# Altium PCB FM110236A1.PcbDoc
Units mm, origin at the board's own origin, x right, y up, seen from the top; angles counter-clockwise.
Board outline 40 x 24 mm, 4 copper layers (Top Layer, Internal Plane 1, Internal Plane 2, Bottom Layer); 14 components, 21 nets, 61 pads, 14 vias.
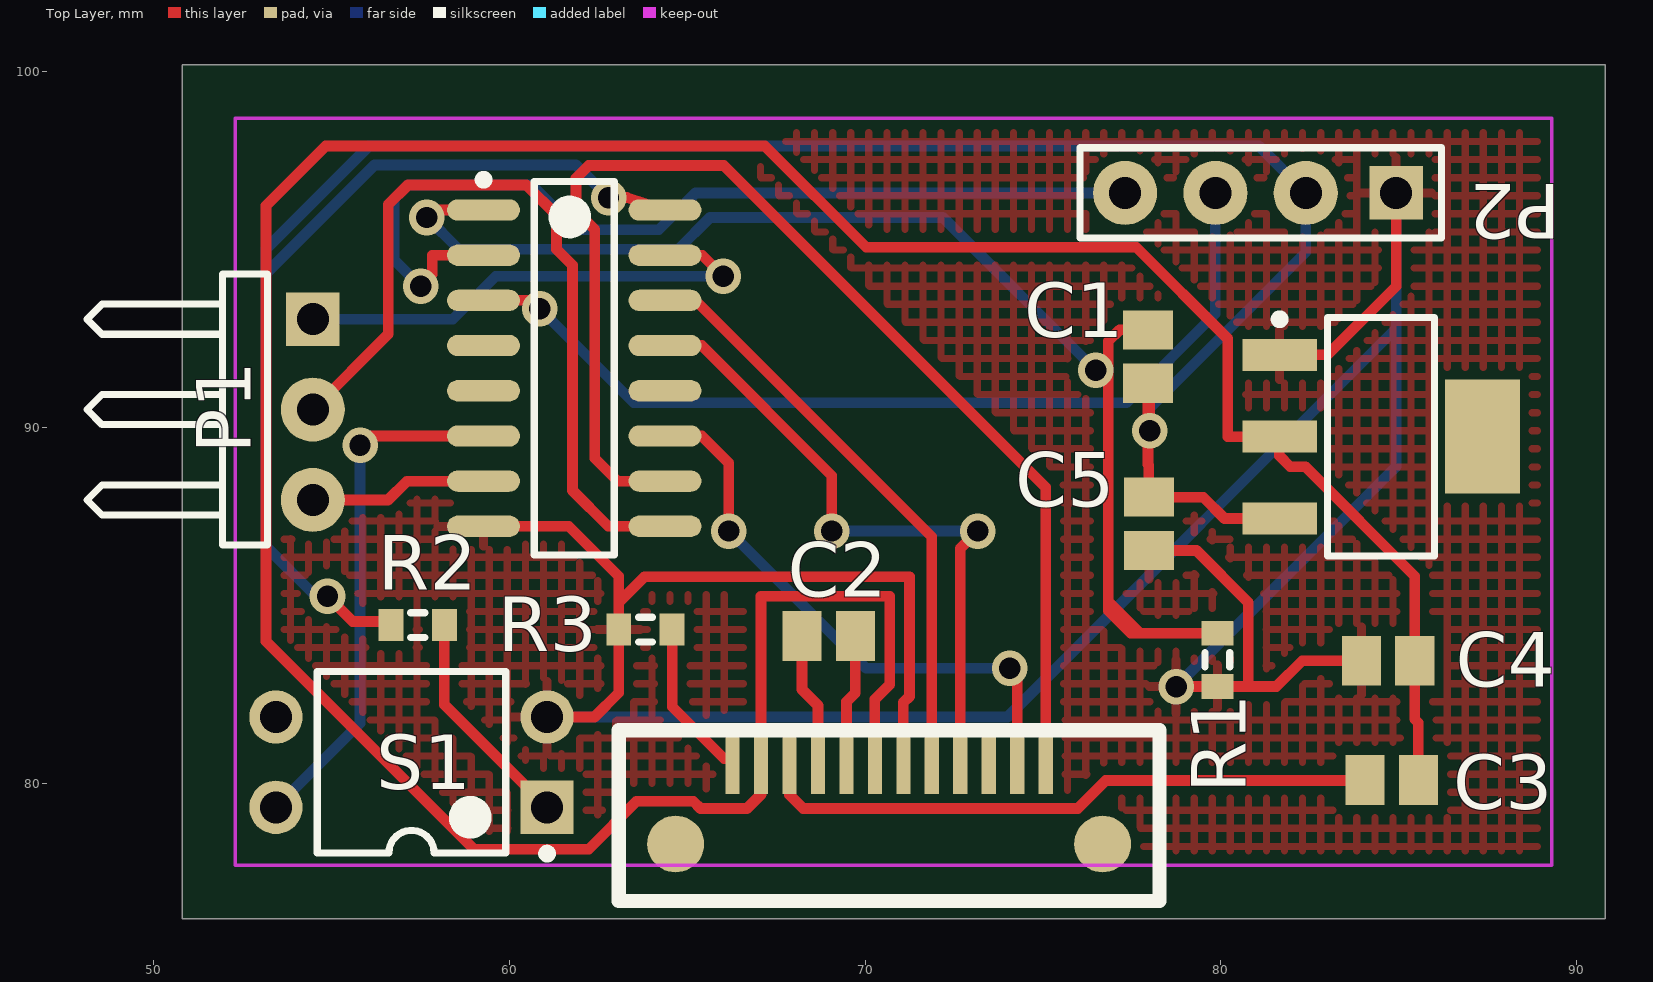
[diagram p0: Top Layer view]
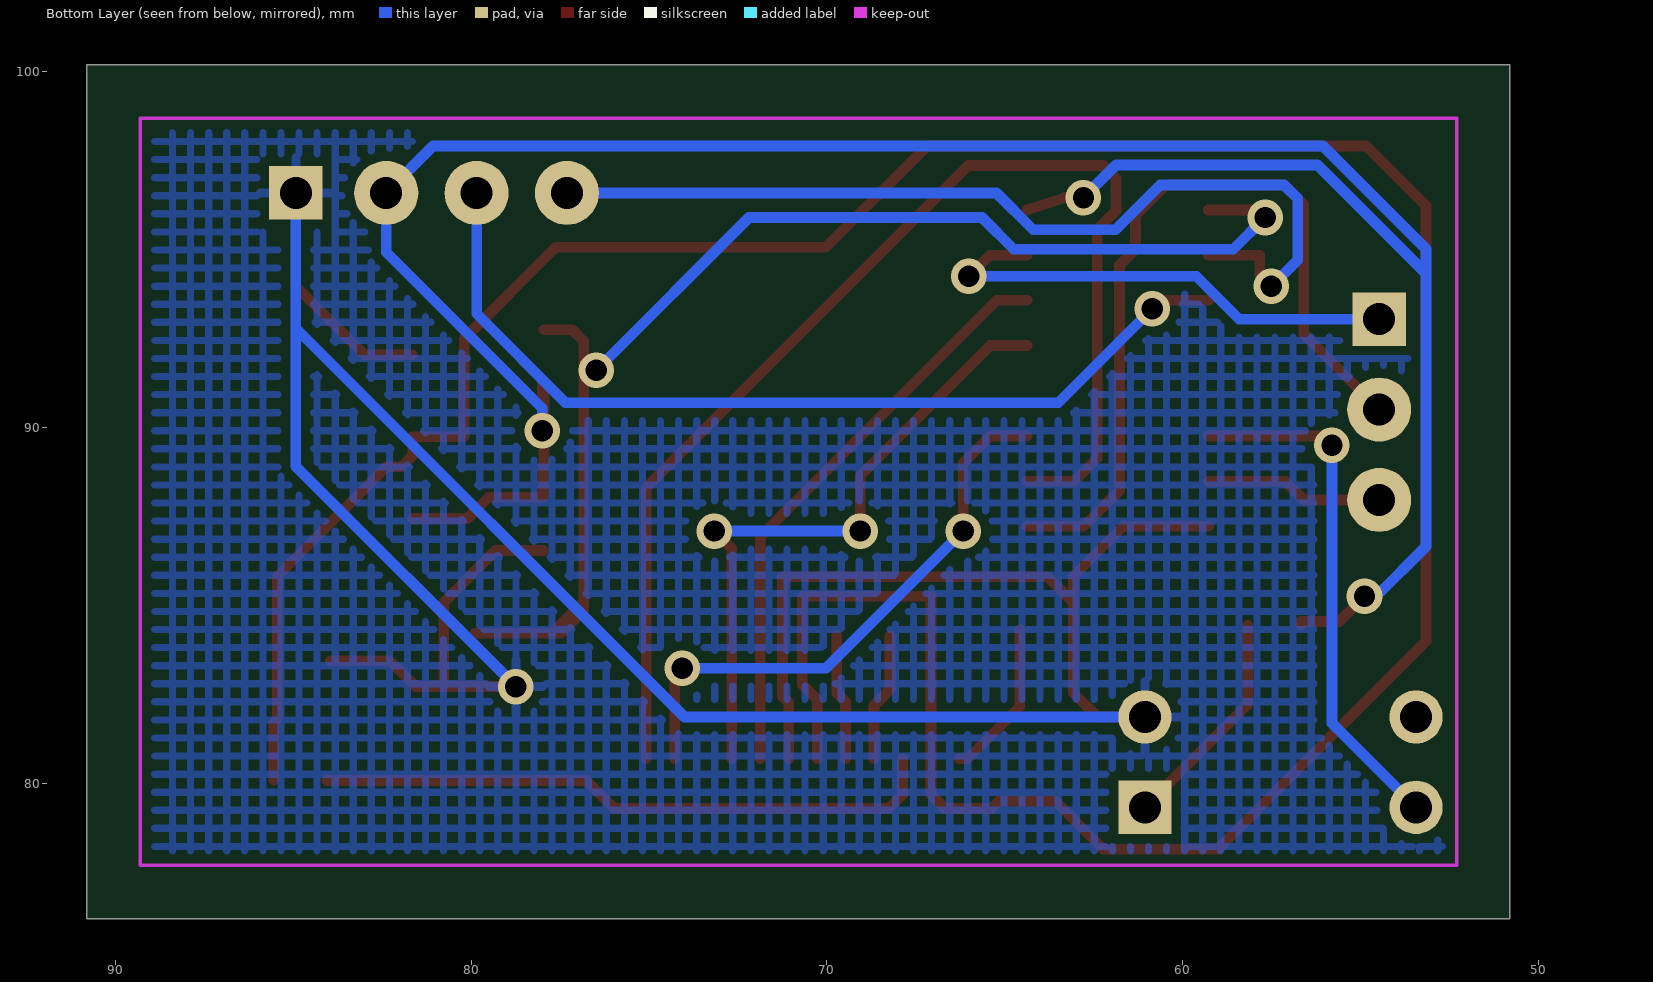
[diagram p1: Bottom Layer view, seen from below]
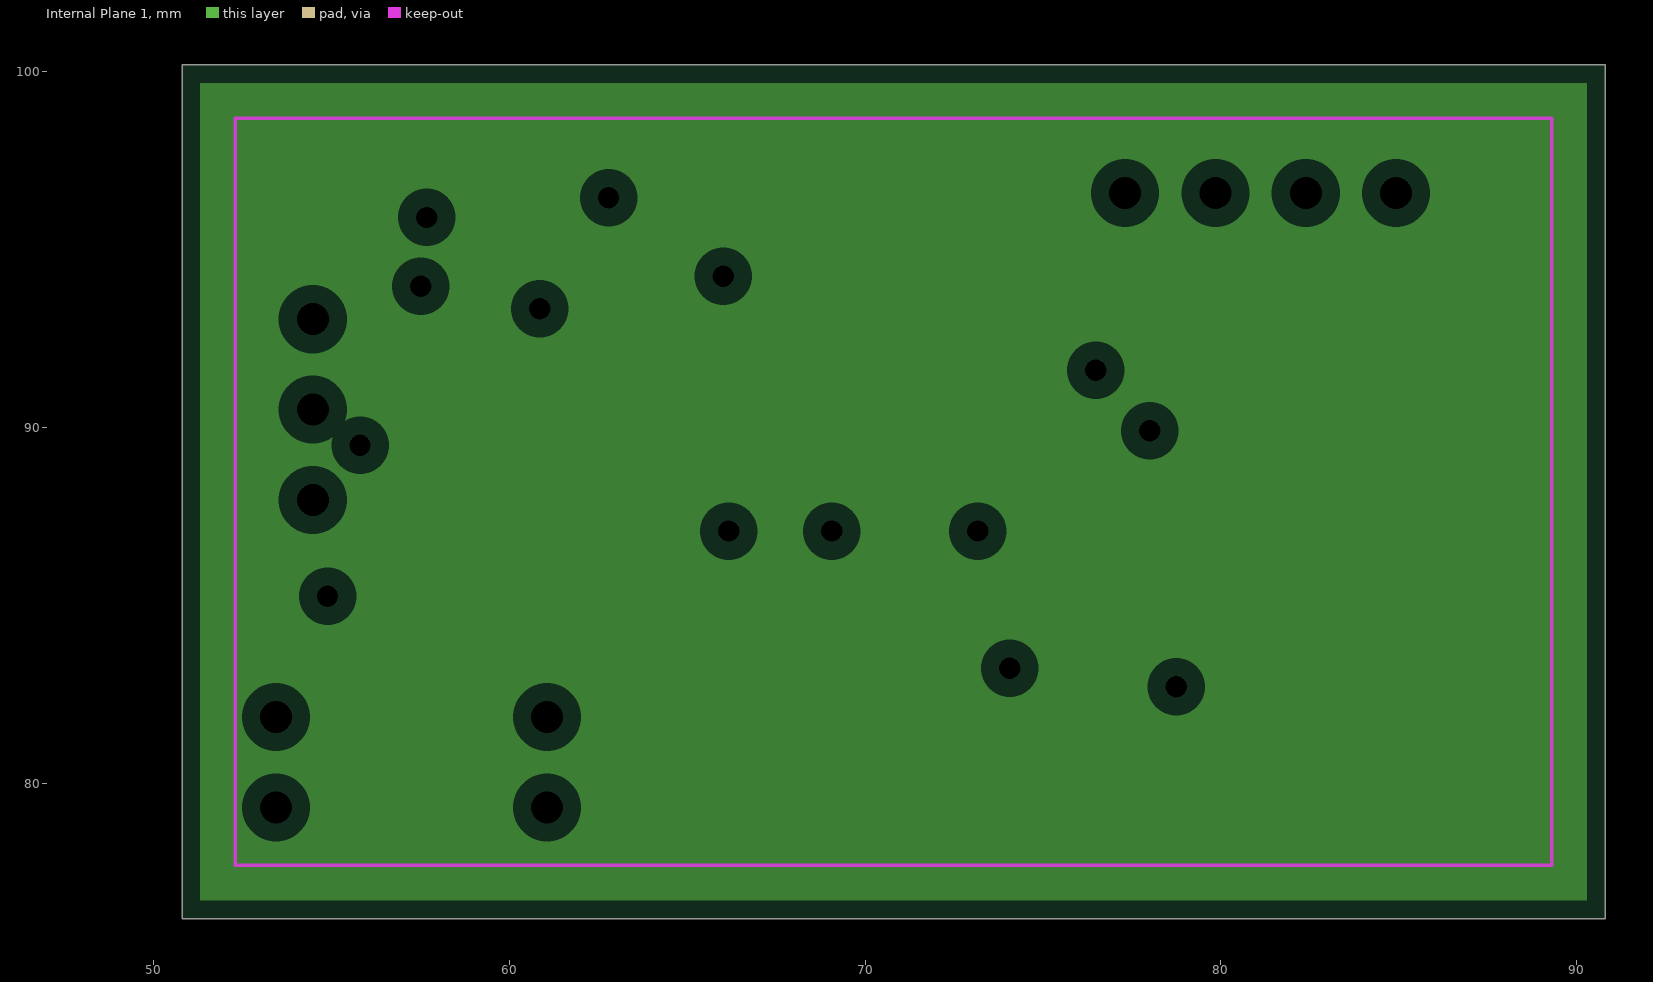
[diagram p2: Internal Plane 1, clearances drawn from the general rule]
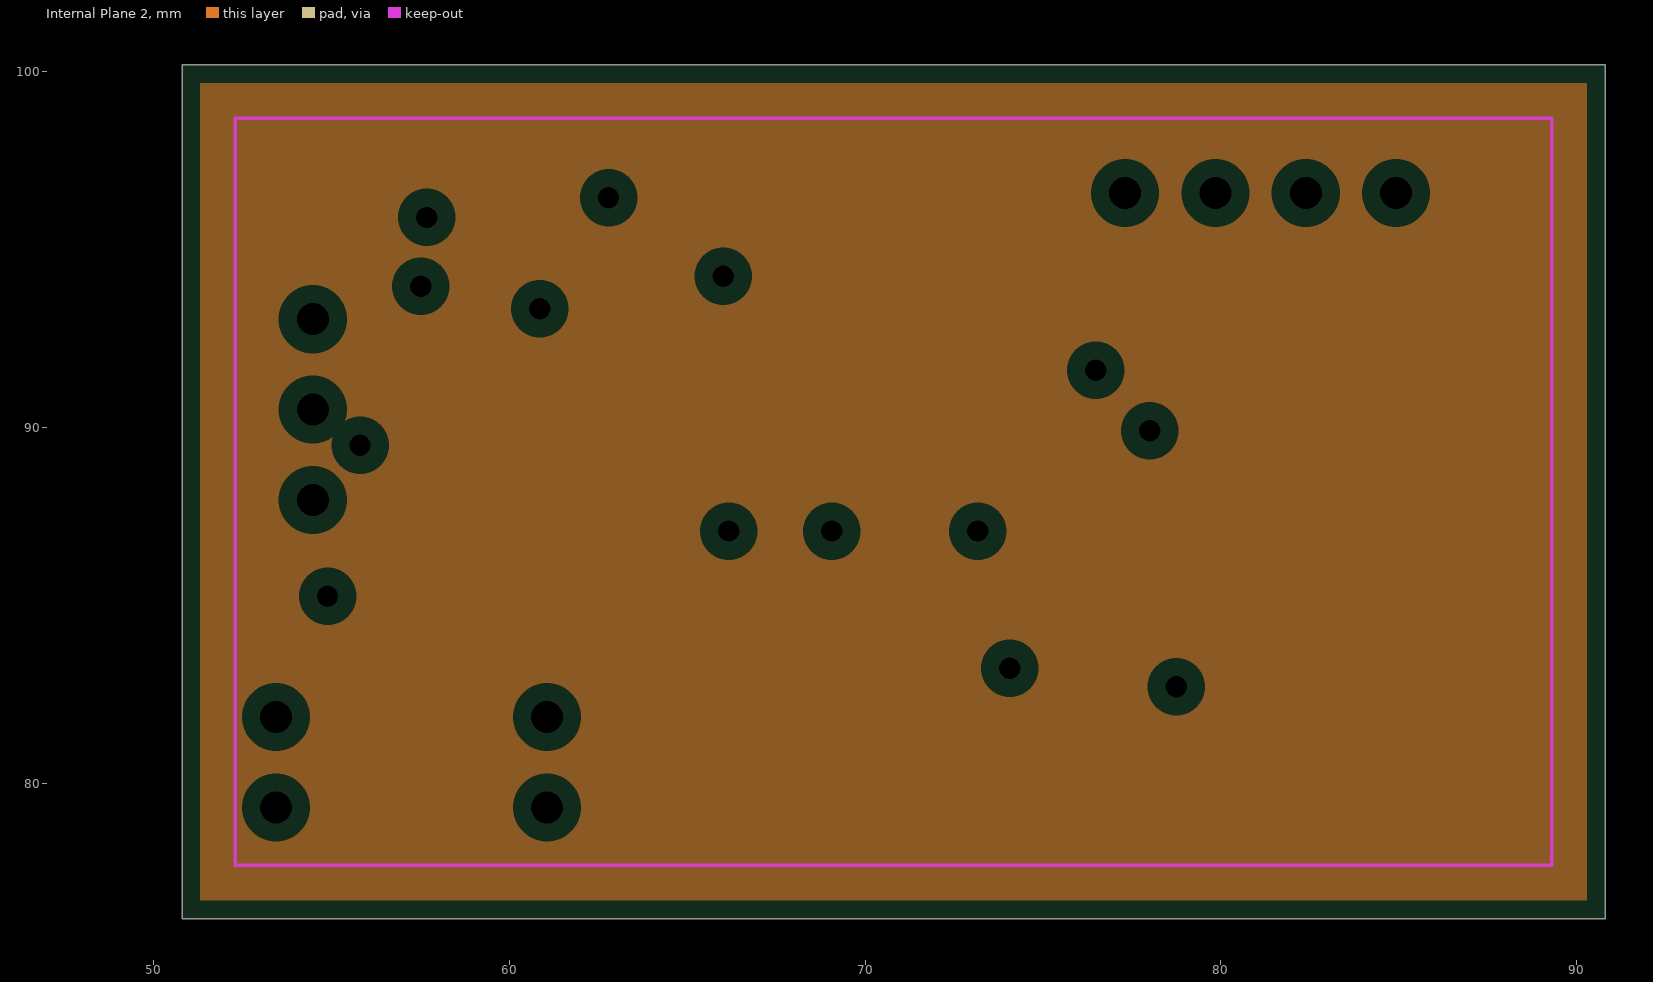
[diagram p3: Internal Plane 2, clearances drawn from the general rule]

## Layer stack, top to bottom
Top Layer: signal copper 0.0356
Dielectric: dielectric 0.32, FR-4, Dk 4.8
Internal Plane 1: plane copper 0.0356
Dielectric: dielectric 0.32, FR-4, Dk 4.8
Internal Plane 2: plane copper 0.0356
Dielectric: dielectric 0.32, FR-4, Dk 4.8
Bottom Layer: signal copper 0.0356

## Board outline
50.8,76.2 90.8,76.2 90.8,100.2 50.8,100.2

## Design rules (kind name [scope] priority, off if disabled: settings)
Clearance [All] p1: gap=0.25
PlaneClearance [All] p1: clearance=0.508
PlaneConnect [All] p1: planeconnectstyle=Relief reliefexpansion=0.508 reliefentries=4 reliefconductorwidth=0.254 reliefairgap=0.254
PolygonConnect [All] p1: connectstyle=Relief reliefconductorwidth=0.254 reliefentries=4 polygonreliefangle="90 Angle"
RoutingVias [All] p1: holewidth=0.6 width=1 viastyle="Through Hole" minholewidth=0.711 minwidth=1.27 maxholewidth=0.711 maxwidth=1.27
SilkscreenOverComponentPads [All] p1: minsilkscreentomaskgap=0.254
SolderMaskExpansion [All] p1: expansion=0.102
Width [All] p1: maxlimit=0.5 minlimit=0.28 preferedwidth=0.3
25 further rules are at their usual default settings.

## Classes and differential pairs
component class FM110236A: C1 C2 C3 C4 C5 P1 P2 R1 R2 R3 S1

## Components (designator, comment, footprint, x,y, rotation, side; value= is the part's Value field where it differs from the comment)
*1 "J1" PCBComponent_1 75.075,82.3 r180 top
*2 "U1" TSOP127P620X160-16N 61.825,91.675 r0 top
C1 "" C0805 77.95,92 r270 top
C2 "Cap Pol3" C0805 68.975,84.15 r180 top
C3 "Cap Pol3" C0805 84.8,80.1 r180 top
C4 "Cap Pol3" C0805 84.7,83.45 r0 top
C5 "Cap Pol3" C0805 77.975,87.3 r90 top
P1 "Header 3H" HDR1X3H 54.475,93.05 r270 top
P2 "Header 4" HDR1X4 84.925,96.6 r180 top
R1 "Res3" J1-0603 79.9,83.475 r90 top
R2 "Res3" J1-0603 57.425,84.45 r180 top
R3 "120" J1-0603 63.825,84.325 r180 top
S1 "SW DIP-2" DIP-4 57.25,80.6 r180 top
VR1 "AMS1117-3.3" SOT223_L 84.5,89.75 r0 top

## Footprints (in the part's own frame and the unit in brackets; to place one, negate y for a bottom-side part, rotate by r counter-clockwise, add the part's x,y. Pads: shape width x height; smd on the part's side, far side on the other; paste and mask are expansions set on the pad)
C0805 [mm] "Chip Capacitor, Body 2.0x1.3mm, IPC High Density"
  rect 1.1x1.4 smd: 1(-0.75,0) 2(0.75,0)
  body extent -1.1,-0.72 1.1,0.72, height 1.4
DIP-4 [mm] "DIP; 4 Leads; Row Spacing 7.62 mm; Pitch 2.54 mm"
  rect 1.5x1.5 hole 0.9: 1(-3.81,1.27)
  round 1.5 hole 0.9: 2(-3.81,-1.27) 3(3.81,-1.27) 4(3.81,1.27)
  silkscreen extent -3.94,-2.55 2.65,2.69, body extent -3.15,-2.5 3.15,2.5, height 5.6
HDR1X3H [mm] "Connector; Header; 3 Position; Right Angle"
  rect 1.5x1.5 hole 0.9: 1(0,0)
  round 1.8 hole 0.9: 2(2.54,0) 3(5.08,0)
  silkscreen extent -1.27,-6.35 6.35,-1.27
HDR1X4 [mm] "Connector; Header; 4 Position"
  rect 1.5x1.5 hole 0.9: 1(0,0)
  round 1.8 hole 0.9: 2(2.54,0) 3(5.08,0) 4(7.62,0)
  silkscreen extent -1.27,-1.27 8.89,1.27
J1-0603 [mm] "Chip Resistor, Body 1.6x0.8mm, IPC High Density"
  rect 0.7x0.9 smd: 1(-0.75,0) 2(0.75,0)
  silkscreen extent -0.2,-0.35 0.2,0.35, body extent -0.85,-0.48 0.85,0.48, height 0.9
PCBComponent_1 [mm]
  rect 0.4x2 smd: 1(0,1.6) 2(0.8,1.6) 3(1.6,1.6) 4(2.4,1.6) 5(3.2,1.6) 6(4,1.6) 7(4.8,1.6) 8(5.6,1.6) 9(6.4,1.6) 10(7.2,1.6) 11(8,1.6) 12(8.8,1.6)
  round 1.6 smd: ""(-1.6,4) ""(10.4,4)
  silkscreen extent -3.2,0.8 12,5.6
SOT223_L [mm] "SOT223, 4-Leads, Body 6.5x3.5mm, Pitch 2.3mm, Lead Span 7mm, IPC High Density"
  rect 2.1x0.9 smd: 1(-2.85,2.3) 2(-2.85,0) 3(-2.85,-2.3)
  rect 2.1x3.2 smd: 4(2.85,0)
  silkscreen extent -2.97,-3.35 1.5,3.42, body extent -1.85,-3.35 1.85,3.35, height 1.7
TSOP127P620X160-16N [mm] "TSOP, 16-Leads, Body 10.5x4.1mm (max), Pitch 1.27mm, IPC Medium Density"
  oval 2.05x0.6 smd: 1(-2.55,4.445) 2(-2.55,3.175) 3(-2.55,1.905) 4(-2.55,0.635) 5(-2.55,-0.635) 6(-2.55,-1.905) 7(-2.55,-3.175) 8(-2.55,-4.445) 9(2.55,-4.445) 10(2.55,-3.175) 11(2.55,-1.905) 12(2.55,-0.635) 13(2.55,0.635) 14(2.55,1.905) 15(2.55,3.175) 16(2.55,4.445)
  silkscreen extent -2.67,-5.25 1.13,5.42, body extent -2.05,-5.25 2.05,5.25, height 1.6

## Part data
*1: library part Component_1
*2: library part Component_3
C1: library part "Cap Pol3", "Polarized Capacitor (Surface Mount)"
C2 C3 C4 C5: "Polarized Capacitor (Surface Mount)"
P1: "Header, 3-Pin, Right Angle"
P2: "Header, 4-Pin"
R1 R2: "Resistor"
R3: library part Res3, "Resistor"
S1: "DIP Switch, 2 Position, SPST"
VR1: library part "Volt Reg", "Voltage Regulator"

## Via types
v1: diameter 1, hole 0.6, Top Layer to Bottom Layer, 14 vias

## Nets (pads, with @x,y where several pads share a name; then routed paths per layer and width w, separated by ;. In a path a pad name is that pad's centre, name@x,y a point inside that pad or via, vN(x,y) a via of type N, cw(c..) or ccw(c..) an arc to the next point about the centre after c; other vN are vias at no path point)
A0: *2.12
A1: *1.3
CSB: *1.1 *2.10 | length 35
  Top Layer w0.3: *2.10 63.043,88.5 62.4,89.143 62.4,95.57 61.874,96.096 61.874,97.014 62.23,97.37 66.028,97.37 75.075,88.323 *1.1
GND: *1.6 *2.8 C4.1 C5.1 P2.1 R1.1 R3.2 S1.2 VR1.1 | length 86.4
  Top Layer w0.3: *2.8 61.672,87.23 63.075,85.827 63.075,85.09 ; S1.2 62.395,81.87 63.075,82.55 R3.2 63.075,85.09 ; *1.6 71.075,82.276 71.247,82.448 71.247,85.816 63.801,85.816 63.075,85.09 ; C5.1 79.312,86.55 80.772,85.09 80.772,82.725 ; v1(78.74,82.725) R1.1 80.772,82.725 ; VR1.1 82.995,92.05 84.925,93.98 P2.1 ; C4.1 82.285,83.45 81.559,82.725 80.772,82.725
  Bottom Layer w0.3: S1.2 74.001,81.87 84.925,92.794 ; v1(78.74,82.725) 84.925,88.91 84.925,92.794 ; P2.1 84.925,92.794
Net*1_7: *1.7 *1.11 C3.1 C4.2 VR1.2 | length 89
  Top Layer w0.3: *1.7 70.275,82.372 70.688,82.785 70.688,85.266 67.075,85.266 *1.11 67.075,79.692 66.681,79.299 65.373,79.299 65.17,79.502 63.576,79.502 62.23,78.156 59.009,78.156 53.162,84.002 53.162,96.243 54.839,97.92 67.18,97.92 70.028,95.072 77.622,95.072 80.188,92.507 80.188,89.75 VR1.2@81.636,89.75 ; VR1.2 VR1.2@81.636,89.75 ; C3.1 85.55,81.712 85.45,81.812 C4.2 85.45,85.827 82.377,88.9 81.953,88.9 81.636,89.218 VR1.2@81.636,89.75
Net*1_8: *1.8 C2.1 | length 3.6
  Top Layer w0.3: *1.8 69.475,82.296 69.725,82.546 C2.1
Net*1_9: *1.9 C2.2 | length 3.6
  Top Layer w0.3: C2.2 68.225,82.644 68.675,82.194 *1.9
Net*1_10: *1.10 C3.2 | length 17.7
  Top Layer w0.3: *1.10 67.875,79.686 68.263,79.299 75.977,79.299 76.764,80.086 84.05,80.086 C3.2
Net*1_12: *1.12 R3.1 | length 4.5
  Top Layer w0.3: R3.1 64.575,82.161 66.04,80.696 66.275,80.696 *1.12
Net*2_1: *2.1 C1.1 R1.2 | length 36.9
  Top Layer w0.3: v1(57.683,95.91) 57.893,96.12 *2.1 ; v1(76.479,91.618) 76.835,91.262 ; C1.1 77.153,92.75 76.835,92.432 76.835,91.262 ; R1.2 77.725,84.225 ; 76.835,85.115 77.725,84.225 ; 76.835,85.115 76.835,84.86 77.47,84.225 77.725,84.225 ; 76.835,85.115 76.835,91.262
  Bottom Layer w0.3: v1(57.683,95.91) 58.575,95.019 64.749,95.019 65.64,95.91 72.187,95.91 v1(76.479,91.618)
Net*2_6: *2.6 S1.4 | length 14.7
  Top Layer w0.3: v1(55.804,89.51) 56.064,89.77 *2.6
  Bottom Layer w0.3: S1.4 55.804,81.694 v1(55.804,89.51)
NetR2_1: R2.1 S1.1 | length 6.3
  Top Layer w0.3: R2.1 58.175,82.215 S1.1
P1.7: *2.15 P1.1 | length 13.9
  Top Layer w0.3: *2.15 65.418,94.85 v1(66.008,94.26)
  Bottom Layer w0.3: P1.1 58.407,93.05 59.617,94.26 v1(66.008,94.26)
P3.4: *2.7 P1.3 | length 5
  Top Layer w0.3: P1.3 56.591,87.97 57.121,88.5 *2.7
P3.7: *2.9 P1.2 | length 22.9
  Top Layer w0.3: P1.2 56.6,92.635 56.6,96.275 57.15,96.825 60.477,96.825 61.324,95.978 61.324,95.02 61.776,94.567 61.776,88.236 62.782,87.23 *2.9
RST: *1.2 *2.11 | length 16.1
  Top Layer w0.3: *2.11 65.405,89.77 66.167,89.008 v1(66.167,87.097) ; v1(74.066,83.236) 74.275,83.027 *1.2
  Bottom Layer w0.3: v1(66.167,87.097) 70.028,83.236 v1(74.066,83.236)
RXD: *2.2 P2.4 | length 26.9
  Top Layer w0.3: v1(57.506,93.98) 57.836,94.31 57.836,94.85 *2.2
  Bottom Layer w0.3: v1(57.506,93.98) 56.769,94.717 56.769,96.444 57.15,96.825 60.633,96.825 61.889,95.569 64.2,95.569 65.231,96.6 P2.4
SCL: *1.4 *2.13 | length 18.5
  Top Layer w0.3: *2.13 65.405,92.31 69.063,88.652 v1(69.063,87.097) ; *1.4 72.675,86.608 v1(73.164,87.097)
  Bottom Layer w0.3: v1(69.063,87.097) v1(73.164,87.097)
SDA: *1.5 *2.14 | length 16.5
  Top Layer w0.3: *2.14 65.227,93.58 71.875,86.932 *1.5
TXD: *2.3 P2.3 | length 26.2
  Top Layer w0.3: *2.3 60.623,93.58 v1(60.858,93.345)
  Bottom Layer w0.3: v1(60.858,93.345) 63.498,90.706 77.345,90.706 79.845,93.205 P2.3
VCC: *2.16 C1.2 C5.2 P2.2 R2.2 VR1.3 | length 73.7
  Top Layer w0.3: v1(54.889,85.268) 55.601,84.557 56.675,84.557 R2.2 ; v1(62.789,96.469) 63.303,96.469 *2.16 ; v1(78.003,89.916) 78.003,91.25 C1.2 77.95,88.975 77.975,88.95 C5.2 79.502,88.05 80.102,87.45 VR1.3
  Bottom Layer w0.3: v1(54.889,85.268) 54.559,85.268 53.162,86.665 53.162,94.336 ; v1(62.789,96.469) 61.874,97.384 56.21,97.384 53.162,94.336 ; v1(78.003,89.916) 78.003,90.551 82.385,94.933 P2.2 81.068,97.917 56.058,97.917 53.162,95.021 53.162,94.336
pads on no net: *1. *2.4 *2.5 S1.3 VR1.4

## Polygon pours and split planes (outlines as drawn)
GND on Top Layer "Top Layer-No Net" (hatched 90Degree grid 0.508 track 0.203, remove dead copper, pour order 6): 50.775,76.175 90.775,76.175 90.775,100.25 90.7,100.175 50.8,100.175
GND on Bottom Layer "Top Layer-No Net" (hatched 90Degree grid 0.508 track 0.203, remove dead copper, pour order 8): 50.75,76.2 90.675,76.2 90.75,76.275 90.8,76.325 90.8,100.175 50.8,100.175 50.775,100.2
no net on Internal Plane 1 (split plane): 90.8,76.2 50.8,76.2 50.8,100.2 90.8,100.2
no net on Internal Plane 2 (split plane): 90.8,76.2 50.8,76.2 50.8,100.2 90.8,100.2

## Keep-outs
Keep-Out Layer:
  lines w0.1: 52.3,77.7 89.3,77.7 89.3,98.7 52.3,98.7 52.3,77.7

## Dimensions
52.3,77.7 to 89.3,77.7 on Mechanical 1
52.3,77.7 to 52.3,98.7 on Mechanical 1